# Altium PCB DRLGabarit.PcbDoc
Units mm, origin at the board's own origin, x right, y up, seen from the top; angles counter-clockwise.
Board outline 152.4 x 101.6 mm, 2 copper layers (Top Layer, Bottom Layer); 11 components, 11 nets, 38 pads, 0 vias.
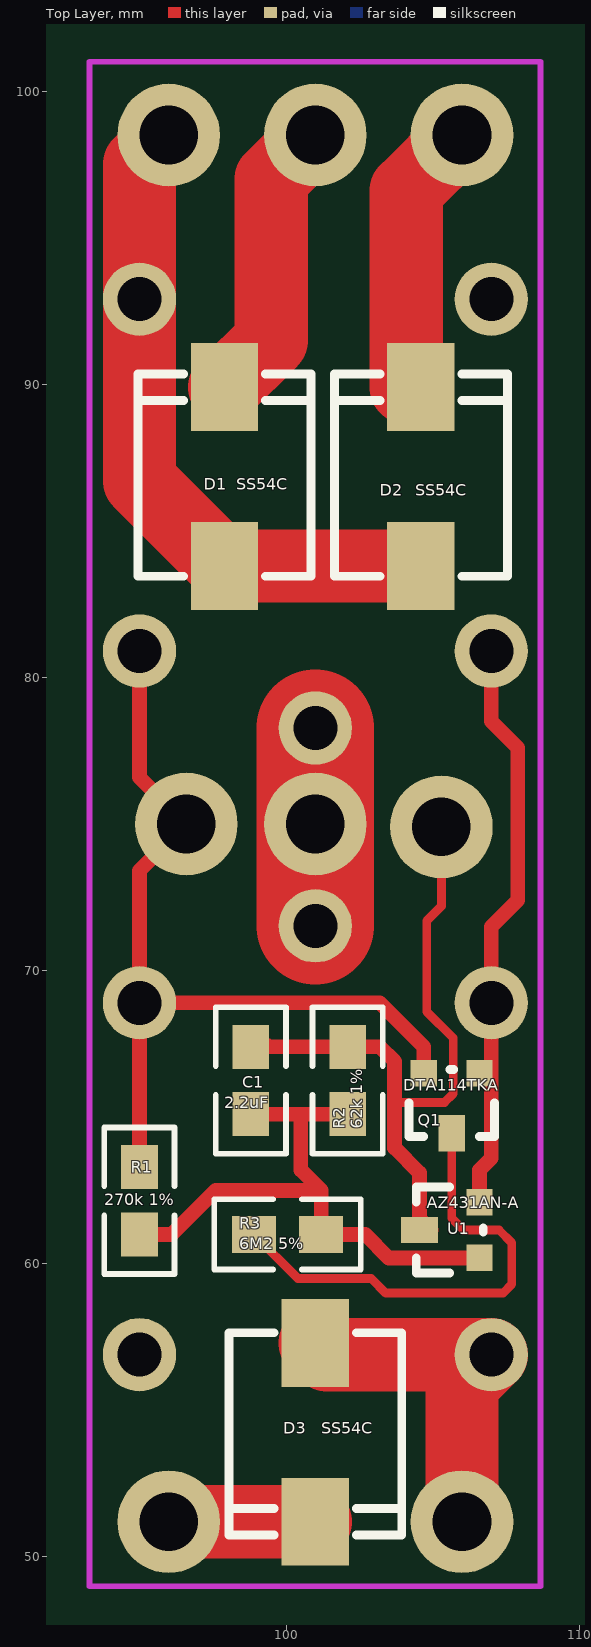
[diagram p0: Top Layer view]
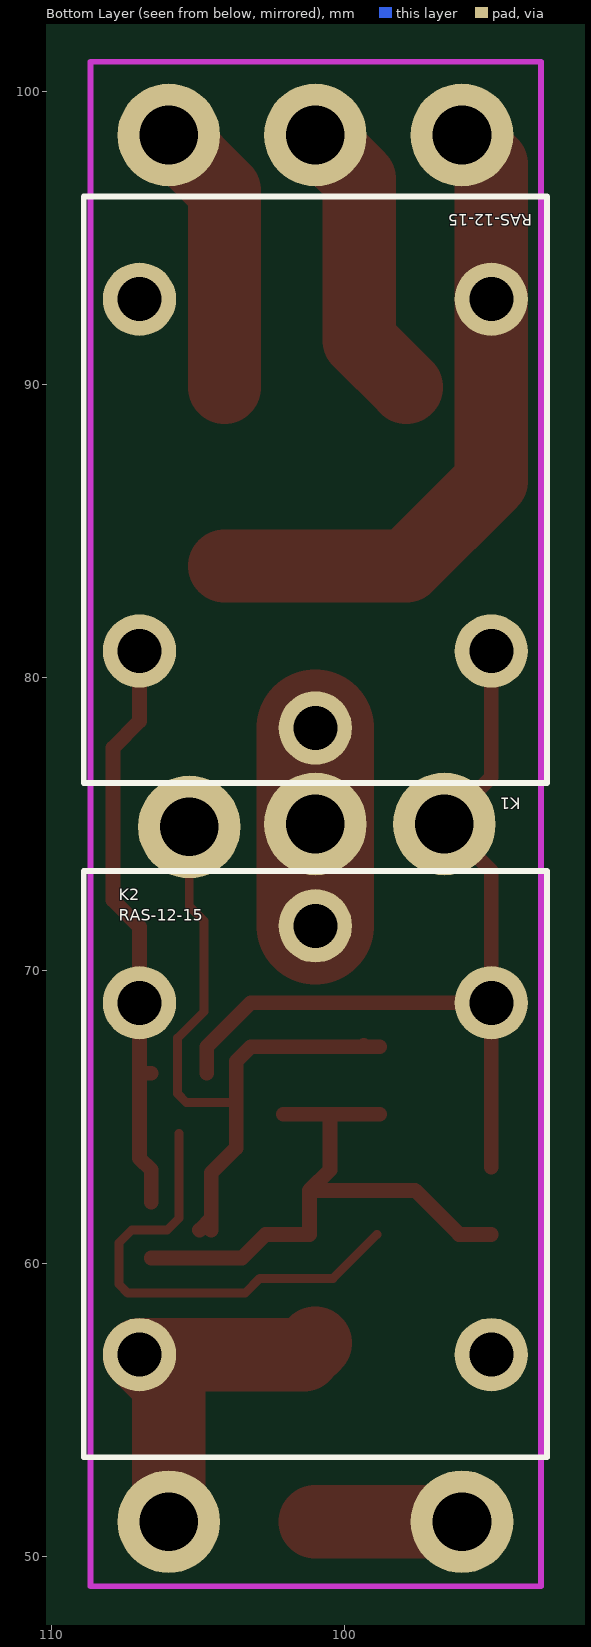
[diagram p1: Bottom Layer view, seen from below]

## Layer stack, top to bottom
Top Layer: signal copper 0.0356
Dielectric: dielectric 0.32, FR-4, Dk 4.8
Bottom Layer: signal copper 0.0356

## Board outline
25.4,25.4 177.8,25.4 177.8,127 25.4,127

## Design rules (kind name [scope] priority, off if disabled: settings)
Clearance [All] p1: gap=0.254
ComponentClearance [All] p1 off: gap=0 collisioncheckmode=3 verticalgap=0.254 showdistances=FALSE
PolygonConnect [All] p1: connectstyle=Relief reliefconductorwidth=0.254 reliefentries=4 polygonreliefangle="90 Angle"
RoutingVias [All] p1: holewidth=0.711 width=1.27 viastyle="Through Hole" minholewidth=0.711 minwidth=1.27 maxholewidth=0.711 maxwidth=1.27
SilkscreenOverComponentPads [All] p1: minsilkscreentomaskgap=0.254
SolderMaskExpansion [All] p1: expansion=0.102
Width [All] p1: maxlimit=5 minlimit=0.25 preferedwidth=0.25
26 further rules are at their usual default settings.

## Components (designator, comment, footprint, x,y, rotation, side; value= is the part's Value field where it differs from the comment)
C1 "2.2uF" 0805 98.8,65.1 r90 top
D1 "SS54C" SMC 97.9,89.9 r90 top
D2 "SS54C" SMC 104.6,89.9 r90 top
D3 "SS54C" SMC 101,51.2 r270 top
K1 "RAS-12-15" RELAY5PIN 95,80.9 r0 bottom
K2 "RAS-12-15" RELAY5PIN 107,68.9 r180 bottom
Q1 "DTA114TKA" sot-23 106.6,66.5 r180 top
R1 "270k 1%" 0805 95,63.3 r270 top
R2 "62k 1%" 0805 102.1,65.1 r90 top
R3 "6M2 5%" 0805 98.9,61 r0 top
U1 "AZ431AN-A" SOT-23 106.6,60.2 r90 top

## Footprints (in the part's own frame and the unit in brackets; to place one, negate y for a bottom-side part, rotate by r counter-clockwise, add the part's x,y. Pads: shape width x height; smd on the part's side, far side on the other; paste and mask are expansions set on the pad)
0805 [mm]
  rect 1.5x1.25 smd: 1(0,0) 2(2.3,0)
  silkscreen extent -1.35,-1.2 3.65,1.2
RELAY5PIN [mm]
  round 2.5 hole 1.5: 1(6,2.625) 2(0,-12) 3(12,-12) 4(12,0) 5(0,0)
  silkscreen extent -1.9,-15.5 13.9,4.5
SMC [mm]
  rect 3x2.3 smd: 1(0,0) 2(-6.1,0)
  silkscreen extent -6.45,-2.95 0.45,2.95
sot-23 [mm]
  rect 0.9x0.9 smd: 1(0,0) 3(1.9,0)
  rect 0.9x1.25 smd: 2(0.95,2.05)
  silkscreen extent -0.51,-0.13 2.41,2.16
SOT-23 [mm]
  rect 0.9x0.9 smd: 1(0,0) 3(1.9,0)
  rect 0.9x1.25 smd: 2(0.95,2.05)
  silkscreen extent -0.51,-0.13 2.41,2.16

## Part data
C1: library part CAP, "Capacitor"
D1 D2 D3: library part DIODE, "Diode"
K1 K2: library part RELAY-SPDT
Q1: library part PNP, "PNP Bipolar Transistor"
R1 R2 R3: library part Res1, "Resistor"
U1: library part TL431

## Free pads (board coordinates)
  round 3.5 hole 2: 0(96,51.2) 0(96,98.5) 0(96.6,75) 0(101,75) 0(101,98.5) 0(105.3,74.9) 0(106,51.2) 0(106,98.5)

## Nets (pads, with @x,y where several pads share a name; then routed paths per layer and width w, separated by ;. In a path a pad name is that pad's centre, name@x,y a point inside that pad or via, vN(x,y) a via of type N, cw(c..) or ccw(c..) an arc to the next point about the centre after c; other vN are vias at no path point)
CATHODE: K1.4 K2.5 Q1.1 U1.3 | length 20.1
  Top Layer w0.5: U1.3 106.6,63.2 107,63.6 Q1.1@107,66.5 ; Q1.1 Q1.1@107,66.5 ; K1.4 107,78.5 107.9,77.6 107.9,72.4 107,71.5 K2.5 Q1.1@107,66.5
G: D3.1 pad.0@96,51.2 | length 5
  Top Layer w2.5: pad.0@96,51.2 D3.1
L: D1.2 D2.2 K1.2 pad.0@96,98.5 | length 22.5
  Top Layer w2.5: pad.0@96,98.5 95,97.5 K1.2 95,86.7 D1.2 D2.2@104.1,83.8
LG: D1.1 pad.0@101,98.5 | length 9.9
  Top Layer w2.5: D1.1 99.5,91.5 99.5,94.2 99.5,97 pad.0@101,98.5
NetC1_1: C1.1 R1.2 R2.1 R3.2 U1.1 | length 20.2
  Top Layer w0.5: R1.2 96.1,61 97.6,62.5 101.2,62.5 ; C1.1 100.5,65.1 ; R2.1 100.5,65.1 ; U1.1 106.596,60.196 103.504,60.196 102.7,61 R3.2 101.2,62.5 ; 100.5,65.1 100.5,63.2 101.2,62.5
NetQ1_2: Q1.2 R3.1 | length 16.5
  Top Layer w0.3: R3.1 100.4,59.5 102.9,59.5 103.4,59 107.4,59 107.7,59.3 107.7,60.713 107.263,61.15 106.05,61.15 105.65,61.55 Q1.2
PGND: C1.2 pad.0@105.3,74.9 R2.2 U1.2 | length 24.6
  Top Layer w0.3: 103.7,65.5 105.4,65.5 105.7,65.8 105.7,67.7 104.8,68.6 104.8,71.7 105.3,72.2 pad.0@105.3,74.3
  Top Layer w0.5: C1.2 C1.2@99.4,67.4 ; C1.2@99.35,67.45 C1.2@99.4,67.4 ; U1.2 U1.2@104.55,61.55 ; U1.2@104.95,61.15 U1.2@104.55,61.55 ; pad.0@105.3,74.9 105.3,74.3 pad.0@106,75 ; C1.2@99.4,67.4 R2.2 103.2,67.4 103.7,66.9 103.7,65.5 103.7,63.95 104.55,63.1 U1.2@104.55,61.55
POWER: K1.1 K2.1 pad.0@101,75 | length 6.7
  Top Layer w4: K2.1 K1.1
R: D3.2 K2.2 pad.0@106,51.2 | length 12.3
  Top Layer w2.5: D3.2 101.4,56.9 K2.2 106,55.9 pad.0@106,51.2
RG: D2.1 pad.0@106,98.5 | length 9.4
  Top Layer w2.5: D2.1@104.1,89.9 104.1,96.6 pad.0@106,98.5
VCC: K1.5 K2.4 pad.0@96.6,75 Q1.3 R1.1 | length 30.1
  Top Layer w0.5: R1.1 K2.4 ; K1.5 95,76.6 96.6,75 95,73.4 K2.4 ; Q1.3 104.7,67.4 103.2,68.9 K2.4
pads on no net: K1.3 K2.3

## Keep-outs
Keep-Out Layer:
  lines w0.2: 93.3,49 108.675,49 108.675,101 93.3,101 93.3,49